# Altium PCB Roby-Eva.PcbDoc (part 2 of 2)
Units mil, origin at the board's own origin, x right, y up, seen from the top; angles counter-clockwise.
Board outline 3740.16 x 2519.69 mil, 2 copper layers (Top Layer, Bottom Layer); 61 components, 152 nets, 350 pads, 159 vias.
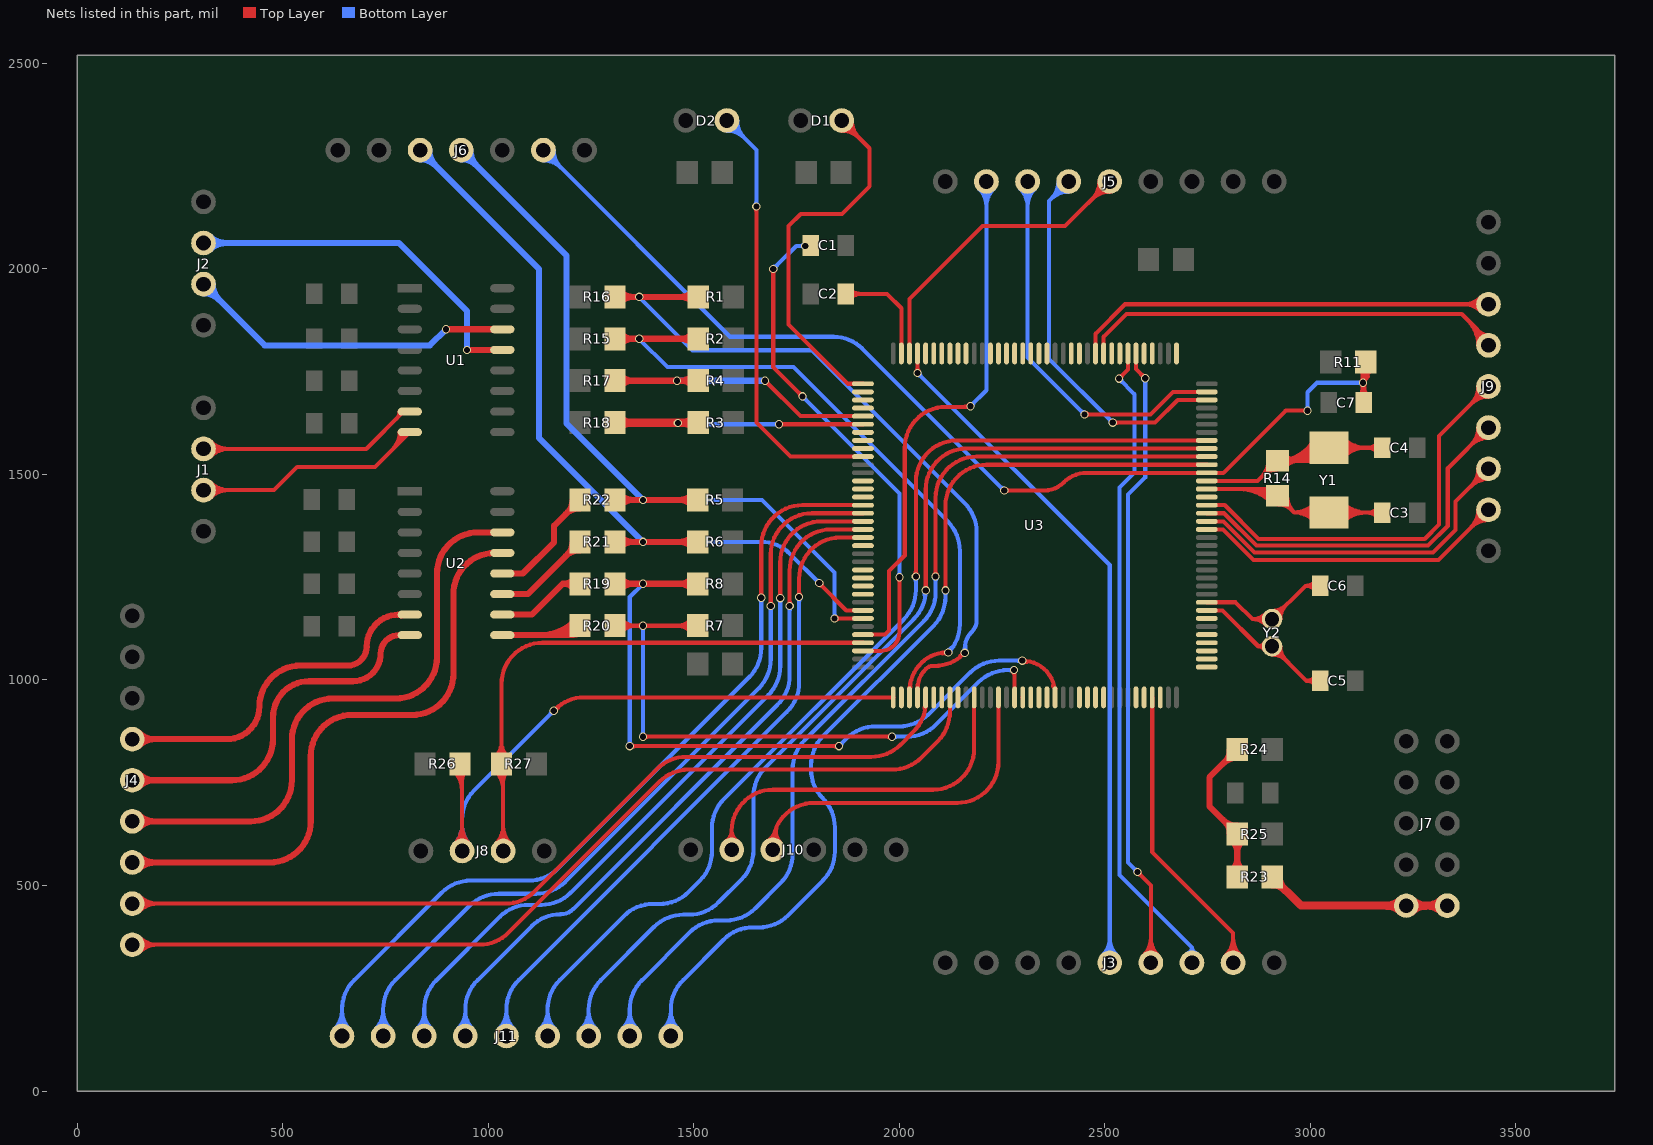
[diagram p2: the nets of this part, all layers, seen from the top]

## Via types
v1: diameter 20, hole 15, Top Layer to Bottom Layer, 106 vias
v2: diameter 19.68, hole 19.68, Top Layer to Bottom Layer, 48 vias
v3: diameter 200, hole 120, Top Layer to Bottom Layer, 4 vias
v4: diameter 25, hole 20, Top Layer to Bottom Layer, 1 vias

## Nets (pads, with @x,y where several pads share a name; then routed paths per layer and width w, separated by ;. In a path a pad name is that pad's centre, name@x,y a point inside that pad or via, vN(x,y) a via of type N, cw(c..) or ccw(c..) an arc to the next point about the centre after c; other vN are vias at no path point) (continued)
NetR19_1: R19.1 U2.10 | length 283.9
  Top Layer w15: U2.10@1034,1159 1106,1159 1180.96,1233.96 ; R19.1@1209.36,1221.46 ccw(c1180.96,1195.44) 1180.96,1233.96 ; R19.1@1209.36,1246.46 cw(c1180.96,1272.48) 1180.96,1233.96 ; R19.1@1223,1233.96 1180.96,1233.96
NetR20_1: R20.1 U2.9 | length 386.8
  Top Layer w15: U2.9@1034,1109 1200.06,1109 R20.1@1223,1131.94 ; 1127.79,1109 ccw(c1127.79,1225.15) R20.1@1209.92,1143.02 ; 1164,1109 ccw(c1164,1188.93) R20.1@1220.53,1132.41 ; R20.1@1200.22,1109 ccw(c1200.22,1152.72) R20.1@1231.13,1121.81
NetR21_1: R21.1 U2.11 | length 311.8
  Top Layer w15: U2.11@1034,1209 1096.02,1209 R21.1@1223,1335.98 ; 1188,1300.98 cw(c1223,1265.99) R21.1@1223,1315.48 ; 1192.83,1305.81 ccw(c1164.67,1333.98) R21.1@1204.5,1333.98
NetR22_1: R22.1 U2.12 | length 356.7
  Top Layer w15: U2.12@1034,1259 1084,1259 1160,1335 1160,1375 R22.1@1223,1438 ; 1188,1403 cw(c1223,1368.01) R22.1@1223,1417.5 ; 1192.83,1407.83 ccw(c1164.67,1436) R22.1@1204.5,1436
NetR23_1: R23.1 R24.1 R25.1 | length 646.9
  Top Layer w15: 2786.9,660 ccw(c2821.89,694.99) R25.1@2821.89,645.5 ; 2786.9,796 cw(c2821.89,761.01) R24.1@2821.89,810.5 ; 2791.73,655.17 cw(c2763.56,627) R25.1@2803.39,627 ; 2791.73,800.83 ccw(c2763.56,829) R24.1@2803.39,829 ; R23.1@2808.81,536.08 ccw(c2777.23,567.66) 2821.89,567.66 ccw(c2866.56,567.66) R23.1@2834.98,536.08 ; R25.1@2808.81,609.92 cw(c2777.23,578.34) 2821.89,578.34 cw(c2866.56,578.34) R25.1@2834.98,609.92 ; R23.1@2821.89,521 R25.1@2821.89,625 2754,692.89 2754,763.11 R24.1@2821.89,831
NRST: C7.2 J6.6 R11.2 U3.25 | length 3076.2
  Top Layer w10: v1(2254.95,1461) 2353.13,1461 ccw(c2353.13,1525.87) 2399,1480 cw(c2456.83,1422.17) 2456.83,1503.95 U3.25@2747.85,1503.95 2787.95,1503.95 2940,1656 v1@2994,1656 ; v1@2258.49,1457.46 cw(c2267.02,1448.93) 2267.02,1461 cw(c2267.02,1473.07) v1@2258.49,1464.54 ; 2978.51,1656 cw(c2978.51,1640.51) v1@2989.46,1651.46 ; C7.2@3118.89,1690.61 ccw(c3093.29,1716.21) 3129.5,1716.21 ccw(c3165.71,1716.21) C7.2@3140.11,1690.61 ; R11.2@3119.55,1756.15 cw(c3095.51,1732.12) v1@3129.5,1732.12 ; v1@3123.71,1720.43 cw(c3104.89,1709.15) 3126.09,1703.47 ; v1@3123.85,1725.78 ccw(c3106.57,1737.36) 3126.65,1742.74 ; v1@3124.46,1719.46 cw(c3112.31,1707.31) 3129.5,1707.31 ; v1@3124.46,1726.54 ccw(c3112.31,1738.69) 3129.5,1738.69 ; v1@3125.5,1718.67 cw(c3119.99,1709.13) 3130.63,1711.98 ; v1@3126.6,1727.8 ccw(c3120.71,1748.09) 3139.22,1737.91 ; C7.2@3129.5,1675 R11.2@3129.5,1768.11 ; 3129.5,1708.48 cw(c3196.91,1708.48) R11.2@3149.24,1756.15 ; v1@3129.5,1732.63 cw(c3172.77,1732.63) R11.2@3142.17,1763.22 ; 3130.77,1737.36 ccw(c3145.87,1733.32) v1@3132.33,1725.5 ; 3131.02,1710.54 cw(c3143.69,1713.94) v1@3132.33,1720.5
  Bottom Layer w10: J6.6@1134,2264 cw(c1134,2203.64) 1176.68,2246.32 cw(c1219.36,2289) J6.6@1159,2289 ; J6.6@1134,2274 cw(c1134,2237.79) 1159.61,2263.39 cw(c1185.21,2289) J6.6@1149,2289 ; J6.6@1134,2289 1588,1835 1791,1835 1791,1834.91 1839.63,1834.91 cw(c1839.63,1734.91) 1910.34,1805.62 v1(2254.95,1461) ; v1@2249.95,1461 ccw(c2237.88,1461) 2246.42,1469.54 ccw(c2254.95,1478.07) v1@2254.95,1466 ; v1@2989.46,1658.54 ccw(c2980.93,1667.07) 2993,1667.07 ccw(c3005.07,1667.07) v1@2996.54,1658.54 ; v1(2993,1655) 2993,1700 3016,1723 v1(3128,1723) ; v1@3124.46,1719.46 ccw(c3115.93,1710.93) 3115.93,1723 ccw(c3115.93,1735.07) v1@3124.46,1726.54
OSC32_IN: C5.1 U3.8 Y2.2 | length 510.5
  Top Layer w10: U3.8@2747.85,1169.31 2785.69,1169.31 2873,1082 ; Y2.2@2888.89,1072.51 ccw(c2873,1063.95) 2873,1082 ; Y2.2@2888.89,1091.49 cw(c2873,1100.05) 2873,1082 ; Y2.2@2906.5,1062 cw(c2906.5,1013.72) 2940.64,1047.86 cw(c2974.78,1082) Y2.2@2926.5,1082 ; C5.1@3012.2,988.14 ccw(c2990.5,969.2) 2990.5,998 ; C5.1@3012.2,1007.86 cw(c2990.5,1026.8) 2990.5,998 ; C5.1@3023.5,998 2990.5,998 ; 2873,1082 Y2.2@2906.5,1082 2990.5,998
OSC32_OUT: C6.1 U3.9 Y2.1 | length 532.4
  Top Layer w10: U3.9@2747.85,1188.99 2818.01,1188.99 2859,1148 ; Y2.1@2892.19,1134.02 ccw(c2859,1101.6) 2859,1148 ; Y2.1@2892.19,1161.98 cw(c2859,1194.4) 2859,1148 ; Y2.1@2906.5,1168 ccw(c2906.5,1216.28) 2940.64,1182.14 ccw(c2974.78,1148) Y2.1@2926.5,1148 ; C6.1@3012.85,1218.44 ccw(c2987.5,1193.3) 2987.5,1229 ; C6.1@3012.85,1239.56 cw(c2987.5,1264.7) 2987.5,1229 ; C6.1@3023.5,1229 2987.5,1229 ; 2859,1148 Y2.1@2906.5,1148 2987.5,1229
OSC_IN: C3.1 R14.2 U3.23 Y1.2 | length 1227.1
  Top Layer w10: U3.23@2747.85,1464.58 2903.42,1464.58 R14.2@2920,1448 2960.48,1407.52 ; 2827.27,1464.58 cw(c2827.27,1357.27) R14.2@2903.15,1433.15 ; 2851.41,1464.58 cw(c2851.41,1381.41) R14.2@2910.22,1440.22 ; 2875.55,1464.58 cw(c2875.55,1405.55) R14.2@2917.29,1447.29 ; R14.2@2922,1427 cw(c2922,1381.13) 2954.44,1413.56 ; R14.2@2933,1448 ccw(c2964.38,1448) R14.2@2942.19,1425.81 ; R14.2@2943,1448 ccw(c2998.53,1448) 2959.26,1408.74 ; Y1.2@3011.45,1384.66 ccw(c2960.48,1339.27) 2960.48,1407.52 ; Y1.2@3011.45,1430.38 cw(c2960.48,1475.77) 2960.48,1407.52 ; Y1.2@3018.92,1391.31 ccw(c2982.78,1359.13) 2982.78,1407.52 ccw(c2982.78,1455.91) Y1.2@3018.92,1423.73 ; Y1.2@3070.1,1390.29 cw(c3110.45,1349.94) 3110.45,1407 ; Y1.2@3070.1,1424.75 ccw(c3112.96,1467.61) 3112.96,1407 ; Y1.2@3077.17,1383.22 cw(c3134.59,1325.8) 3134.59,1407 ; Y1.2@3077.17,1431.82 ccw(c3137.1,1491.75) 3137.1,1407 ; C3.1@3163.89,1396.39 ccw(c3138.29,1370.79) 3138.29,1407 ccw(c3138.29,1443.21) C3.1@3163.89,1417.61 ; C3.1@3174.5,1407 3045.51,1407 Y1.2@3044.99,1407.52 2960.48,1407.52
OSC_OUT: C4.1 R14.1 U3.24 Y1.1 | length 1433.9
  Top Layer w10: U3.24@2747.85,1484.27 2871.27,1484.27 R14.1@2920,1533 ; 2880.74,1493.74 ccw(c2841.47,1533) R14.1@2897,1533 ; 2885.56,1498.56 cw(c2918,1466.13) R14.1@2918,1512 ; R14.1@2897.81,1510.81 ccw(c2875.62,1533) R14.1@2907,1533 ; R14.1@2929.78,1525.22 cw(c2948.56,1506.44) 2948.56,1533 cw(c2948.56,1559.56) R14.1@2929.78,1540.78 ; R14.1@2936.85,1518.15 cw(c2972.7,1482.3) 2972.7,1533 cw(c2972.7,1583.7) R14.1@2936.85,1547.85 ; R14.1@2937.65,1533 ccw(c2937.65,1624.57) Y1.1@3016.21,1577.52 ; 2955.3,1533 ccw(c2955.3,1614) Y1.1@3024.79,1572.38 ; 2972.94,1533 ccw(c2972.94,1603.44) Y1.1@3033.37,1567.25 ; 2990.59,1533 ccw(c2990.59,1592.87) Y1.1@3041.95,1562.11 ; Y1.1@3007.63,1582.66 cw(c2920,1635.14) R14.1@2920,1533 ; Y1.1@3008.23,1533 ccw(c3008.23,1582.3) Y1.1@3050.53,1556.97 ; Y1.1@3070.1,1547.77 cw(c3111.7,1506.17) 3111.7,1565 cw(c3111.7,1623.83) Y1.1@3070.1,1582.23 ; Y1.1@3077.17,1540.7 cw(c3135.84,1482.02) 3135.84,1565 cw(c3135.84,1647.98) Y1.1@3077.17,1589.3 ; C4.1@3163.89,1554.39 ccw(c3138.29,1528.79) 3138.29,1565 ccw(c3138.29,1601.21) C4.1@3163.89,1575.61 ; C4.1@3174.5,1565 Y1.1@3044.99,1565 3012.99,1533 R14.1@2920,1533
PA3: U3.37
PA9: J6.3 R6.1 R21.2 U3.101 | length 2261.3
  Top Layer w10: v1@1804.5,1235.5 1870.69,1169.31 U3.101@1911.23,1169.31 ; v1@1805,1231 cw(c1805,1221.34) 1811.83,1228.17 ; v1@1810,1236 ccw(c1824.49,1236) 1814.24,1225.76
  Top Layer w15: R21.2@1308,1335.98 1358,1335.98 ; R21.2@1321.08,1322.9 cw(c1352.66,1291.32) 1352.66,1335.98 cw(c1352.66,1380.64) R21.2@1321.08,1349.06 ; 1362.98,1335.98 v1(1376,1335.98) v1@1378.5,1335.98 ; v1@1373.52,1335.98 R6.1@1509,1335.98 ; R6.1@1495.92,1322.9 ccw(c1464.34,1291.32) 1464.34,1335.98 ccw(c1464.34,1380.64) R6.1@1495.92,1349.06
  Bottom Layer w10: v1(1376,1335.98) 1663.6,1335.98 cw(c1663.6,1235.98) 1734.31,1306.69 v1(1805,1236) ; v1@1379.54,1332.44 cw(c1388.07,1323.91) 1388.07,1335.98 cw(c1388.07,1348.05) v1@1379.54,1339.51 ; v1@1800,1236 ccw(c1787.93,1236) 1796.46,1244.54 ccw(c1805,1253.07) v1@1805,1241
  Bottom Layer w15: J6.3@834,2266.5 cw(c834,2212.18) 872.41,2250.59 cw(c910.82,2289) J6.3@856.5,2289 ; J6.3@834,2289 1123,2000 1123,1588.98 v1(1376,1335.98)
PA10: J6.4 R5.1 R22.2 U3.102 | length 2237.9
  Top Layer w10: v1(1842.38,1149.62) U3.102@1911.23,1149.62 ; v1@1845.91,1146.09 cw(c1854.45,1137.55) 1854.45,1149.62 cw(c1854.45,1161.69) v1@1845.91,1153.16
  Top Layer w15: R22.2@1308,1438 R5.1@1509,1438 ; R22.2@1321.08,1424.92 cw(c1352.66,1393.34) 1352.66,1438 cw(c1352.66,1482.66) R22.2@1321.08,1451.08 ; R5.1@1495.92,1424.92 ccw(c1464.34,1393.34) 1464.34,1438 ccw(c1464.34,1482.66) R5.1@1495.92,1451.08
  Bottom Layer w10: v1(1376,1438) 1666,1438 1842.38,1261.62 v1(1842.38,1149.62) ; v1@1379.54,1434.46 cw(c1388.07,1425.93) 1388.07,1438 cw(c1388.07,1450.07) v1@1379.54,1441.54 ; v1@1838.84,1153.16 ccw(c1830.31,1161.69) 1842.38,1161.69 ccw(c1854.45,1161.69) v1@1845.91,1153.16
  Bottom Layer w15: J6.4@934,2266.5 cw(c934,2212.18) 972.41,2250.59 cw(c1010.82,2289) J6.4@956.5,2289 ; J6.4@934,2289 1190,2033 1190,1624 v1(1376,1438)
PA15: U3.110
PB3: U3.133
PB4: U3.134
PB5: U3.135
PB8: U3.139
PB9: U3.140
PB12: D1.2 U3.73 | length 1056.9
  Top Layer w10: D1.2@1859.5,2336 cw(c1859.5,2275.64) 1902.18,2318.32 cw(c1944.86,2361) D1.2@1884.5,2361 ; D1.2@1859.5,2346 cw(c1859.5,2309.79) 1885.11,2335.39 cw(c1910.71,2361) D1.2@1874.5,2361 ; D1.2@1859.5,2361 1927,2293.5 1927,2201 1860,2134 1760,2134 1730,2104 1730,1865 1874.51,1720.49 U3.73@1911.23,1720.49
PB13: U3.74
PB14: U3.75
PB15: U3.76
PC6: U3.96
PC7: U3.97
PC8: U3.98
PC9: U3.99
PC13: U3.7
PD0: U3.114
PD1: U3.115
PD3: U3.117
PD10: U3.79
PD11: U3.80
PD12: U3.81
PD13: D2.2 U3.82 | length 1247.7
  Top Layer w10: v1@1648.46,2148.46 cw(c1639.93,2139.93) 1652,2139.93 cw(c1664.07,2139.93) v1@1655.54,2148.46 ; v1(1652,2152) 1652,1626 1734.68,1543.32 U3.82@1911.23,1543.32
  Bottom Layer w10: D2.2@1580.5,2336 cw(c1580.5,2275.64) 1623.18,2318.32 cw(c1665.86,2361) D2.2@1605.5,2361 ; D2.2@1580.5,2346 cw(c1580.5,2309.79) 1606.11,2335.39 cw(c1631.71,2361) D2.2@1595.5,2361 ; D2.2@1580.5,2361 1652,2289.5 v1(1652,2152) ; v1@1648.46,2155.54 ccw(c1639.93,2164.07) 1652,2164.07 ccw(c1664.07,2164.07) v1@1655.54,2155.54
PD14: U3.85
PD15: U3.86
PE1: U3.142
PE2: U3.1
PE3: U3.2
PE4: U3.3
PE5: U3.4
PE6: U3.5
PE7: U3.58
PE8: U3.59
PE9: U3.60
PE10: U3.63
PE11: U3.64
PE12: U3.65
PE13: U3.66
PE14: U3.67
PE15: U3.68
PF10: U3.22
PF11: U3.49
PF12: U3.50
PF13: U3.53
PF14: U3.54
PF15: U3.55
PG0: U3.56
PG1: U3.57
PG2: U3.87
PG3: J11.1 U3.88 | length 2221.8
  Top Layer w10: v1@1660.46,1203.54 ccw(c1651.93,1212.07) 1664,1212.07 ccw(c1676.07,1212.07) v1@1667.54,1203.54 ; v1(1664,1200) 1664,1325.21 cw(c1764,1325.21) 1764,1425.21 U3.88@1911.23,1425.21
  Bottom Layer w10: J11.1@626.32,151.54 ccw(c583.64,194.21) 644,194.21 ccw(c704.36,194.21) J11.1@661.68,151.54 ; J11.1@633.39,144.46 ccw(c607.79,170.07) 644,170.07 ccw(c680.21,170.07) J11.1@654.61,144.46 ; J11.1@644,133.86 644,198.67 cw(c744,198.67) 673.29,269.38 886.62,482.71 cw(c957.33,412) 957.33,512 1098.58,512 ccw(c1098.58,612) 1169.29,541.29 1634.71,1006.71 ccw(c1564,1077.42) 1664,1077.42 v1(1664,1200) ; v1@1660.46,1196.46 cw(c1651.93,1187.93) 1664,1187.93 cw(c1676.07,1187.93) v1@1667.54,1196.46
PG4: J11.2 U3.89 | length 2118
  Top Layer w10: v1@1683.46,1183.54 ccw(c1674.93,1192.07) 1687,1192.07 ccw(c1699.07,1192.07) v1@1690.54,1183.54 ; v1(1687,1180) 1687,1305.53 cw(c1787,1305.53) 1787,1405.53 U3.89@1911.23,1405.53
  Bottom Layer w10: J11.2@726.32,151.54 ccw(c683.64,194.21) 744,194.21 ccw(c804.36,194.21) J11.2@761.68,151.54 ; J11.2@733.39,144.46 ccw(c707.79,170.07) 744,170.07 ccw(c780.21,170.07) J11.2@754.61,144.46 ; J11.2@744,133.86 744,198.67 cw(c844,198.67) 773.29,269.38 954.62,450.71 cw(c1025.33,380) 1025.33,480 1116.58,480 ccw(c1116.58,580) 1187.29,509.29 1657.71,979.71 ccw(c1587,1050.42) 1687,1050.42 v1(1687,1180) ; v1@1683.46,1176.46 cw(c1674.93,1167.93) 1687,1167.93 cw(c1699.07,1167.93) v1@1690.54,1176.46
PG5: J11.3 U3.90 | length 2008.2
  Top Layer w10: v1@1706.46,1202.54 ccw(c1697.93,1211.07) 1710,1211.07 ccw(c1722.07,1211.07) v1@1713.54,1202.54 ; v1(1710,1199) 1710,1285.84 cw(c1810,1285.84) 1810,1385.84 U3.90@1911.23,1385.84
  Bottom Layer w10: J11.3@826.32,151.54 ccw(c783.64,194.21) 844,194.21 ccw(c904.36,194.21) J11.3@861.68,151.54 ; J11.3@833.39,144.46 ccw(c807.79,170.07) 844,170.07 ccw(c880.21,170.07) J11.3@854.61,144.46 ; J11.3@844,133.86 844,198.67 cw(c944,198.67) 873.29,269.38 1027.62,423.71 cw(c1098.33,353) 1098.33,453 1129.58,453 ccw(c1129.58,553) 1200.29,482.29 1680.71,962.71 ccw(c1610,1033.42) 1710,1033.42 v1(1710,1199) ; v1@1706.46,1195.46 cw(c1697.93,1186.93) 1710,1186.93 cw(c1722.07,1186.93) v1@1713.54,1195.46
PG6: J11.4 U3.91 | length 1904.4
  Top Layer w10: v1@1729.46,1183.54 ccw(c1720.93,1192.07) 1733,1192.07 ccw(c1745.07,1192.07) v1@1736.54,1183.54 ; v1(1733,1180) 1733,1266.16 cw(c1833,1266.16) 1833,1366.16 U3.91@1911.23,1366.16
  Bottom Layer w10: J11.4@926.32,151.54 ccw(c883.64,194.21) 944,194.21 ccw(c1004.36,194.21) J11.4@961.68,151.54 ; J11.4@933.39,144.46 ccw(c907.79,170.07) 944,170.07 ccw(c980.21,170.07) J11.4@954.61,144.46 ; J11.4@944,133.86 944,198.67 cw(c1044,198.67) 973.29,269.38 1104.62,400.71 cw(c1175.33,330) 1175.33,430 ccw(c1175.33,475.06) 1207.2,443.2 1703.71,939.71 ccw(c1633,1010.42) 1733,1010.42 v1(1733,1180) ; v1@1729.46,1176.46 cw(c1720.93,1167.93) 1733,1167.93 cw(c1745.07,1167.93) v1@1736.54,1176.46
PG7: J11.5 U3.92 | length 1800.9
  Top Layer w10: v1@1752.46,1205.54 ccw(c1743.93,1214.07) 1756,1214.07 ccw(c1768.07,1214.07) v1@1759.54,1205.54 ; v1(1756,1202) 1756,1246.47 cw(c1856,1246.47) 1856,1346.47 U3.92@1911.23,1346.47
  Bottom Layer w10: J11.5@1026.32,151.54 ccw(c983.64,194.21) 1044,194.21 ccw(c1104.36,194.21) J11.5@1061.68,151.54 ; J11.5@1033.39,144.46 ccw(c1007.79,170.07) 1044,170.07 ccw(c1080.21,170.07) J11.5@1054.61,144.46 ; J11.5@1044,133.86 1044,198.67 cw(c1144,198.67) 1073.29,269.38 1726.71,922.8 ccw(c1656,993.51) 1756,993.51 v1(1756,1202) ; v1@1752.46,1198.46 cw(c1743.93,1189.93) 1756,1189.93 cw(c1768.07,1189.93) v1@1759.54,1198.46
PG8: U3.93
PG10: U3.125 | length 0
PG11: U3.126
PG12: U3.127
PG13: U3.128
PG15: U3.132
PHA_N_L: J3.3 U3.43 | length 1669.3
  Top Layer w10: v1(2534,1733) 2555.92,1754.92 U3.43@2555.92,1794.31 ; v1@2534,1738 ccw(c2534,1750.07) 2542.54,1741.54 ccw(c2551.07,1733) v1@2539,1733
  Bottom Layer w10: v1@2534,1728 cw(c2534,1715.93) 2542.54,1724.46 cw(c2551.07,1733) v1@2539,1733 ; v1(2534,1733) 2572,1695 2572,1505 2535,1468 2535,526 2711.74,349.26 ; J3.3@2702.31,335.24 ccw(c2696.61,349.26) 2711.74,349.26 ; J3.3@2711.74,312.09 2711.74,349.26 ; J3.3@2721.17,335.24 cw(c2726.88,349.26) 2711.74,349.26
PHA_N_R: J5.3 U3.35 | length 1133.7
  Top Layer w10: v1(2450.61,1646) 2611,1646 2665.8,1700.8 U3.35@2747.85,1700.8 ; v1@2454.14,1642.46 cw(c2462.68,1633.93) 2462.68,1646 cw(c2462.68,1658.07) v1@2454.14,1649.54
  Bottom Layer w10: J5.3@2294.06,2194.92 cw(c2251.38,2152.24) 2311.74,2152.24 cw(c2372.1,2152.24) J5.3@2329.42,2194.92 ; J5.3@2301.13,2201.99 cw(c2275.53,2176.39) 2311.74,2176.39 cw(c2347.95,2176.39) J5.3@2322.35,2201.99 ; J5.3@2311.74,2212.6 2311.74,1784.87 v1(2450.61,1646) ; v1@2445.61,1646 ccw(c2433.54,1646) 2442.07,1654.54 ccw(c2450.61,1663.07) v1@2450.61,1651
PHA_P_L: J3.4 U3.42 | length 1759.5
  Top Layer w10: U3.42@2575.6,1794.31 2575.6,1756.4 v1(2598,1734) ; v1@2579,528 cw(c2579,515.93) 2587.54,524.46 cw(c2596.07,533) v1@2584,533 ; v1(2579,533) 2611.74,500.26 J3.4@2611.74,312.09 ; v1@2593,1734 ccw(c2580.93,1734) 2589.46,1742.54 ccw(c2598,1751.07) v1@2598,1739 ; J3.4@2594.06,329.76 ccw(c2551.38,372.44) 2611.74,372.44 ccw(c2672.1,372.44) J3.4@2629.42,329.76 ; J3.4@2601.13,322.69 ccw(c2575.53,348.3) 2611.74,348.3 ccw(c2647.95,348.3) J3.4@2622.35,322.69
  Bottom Layer w10: v1@2574,533 ccw(c2561.93,533) 2570.46,541.54 ccw(c2579,550.07) v1@2579,538 ; v1(2579,533) 2556,556 2556,1451 2598,1493 v1(2598,1734) ; v1@2594.46,1730.46 cw(c2585.93,1721.93) 2598,1721.93 cw(c2610.07,1721.93) v1@2601.54,1730.46
PHA_P_R: J5.4 U3.34 | length 1111.9
  Top Layer w10: v1(2519,1626) 2622,1626 2677.12,1681.12 U3.34@2747.85,1681.12 ; v1@2522.54,1622.46 cw(c2531.07,1613.93) 2531.07,1626 cw(c2531.07,1638.07) v1@2522.54,1629.54
  Bottom Layer w10: J5.4@2386.74,2212.6 cw(c2326.38,2212.6) 2369.06,2169.92 cw(c2411.74,2127.24) J5.4@2411.74,2187.6 ; J5.4@2396.74,2212.6 cw(c2360.53,2212.6) 2386.13,2186.99 cw(c2411.74,2161.39) J5.4@2411.74,2197.6 ; J5.4@2411.74,2212.6 2364,2164.86 2364,1781 v1(2519,1626) ; v1@2514,1626 ccw(c2501.93,1626) 2510.46,1634.54 ccw(c2519,1643.07) v1@2519,1631
PHO_SW_OUT1: J9.8 U3.18 | length 918.2
  Top Layer w10: U3.18@2747.85,1366.16 2786.84,1366.16 2861,1292 3311.07,1292 J9.8@3433.07,1414 ; J9.8@3408.07,1414 cw(c3347.72,1414) 3390.39,1371.32 cw(c3433.07,1328.64) J9.8@3433.07,1389 ; J9.8@3418.07,1414 cw(c3381.86,1414) 3407.46,1388.39 cw(c3433.07,1362.79) J9.8@3433.07,1399
PHO_SW_OUT2: J9.7 U3.19 | length 993.2
  Top Layer w10: U3.19@2747.85,1385.84 2788.37,1385.84 2864.21,1310 3298,1310 3353,1365 3353,1433.93 J9.7@3433.07,1514 ; J9.7@3408.07,1514 cw(c3347.72,1514) 3390.39,1471.32 cw(c3433.07,1428.64) J9.7@3433.07,1489 ; J9.7@3418.07,1514 cw(c3381.86,1514) 3407.46,1488.39 cw(c3433.07,1462.79) J9.7@3433.07,1499
PHO_SW_OUT3: J9.6 U3.20 | length 1070.3
  Top Layer w10: U3.20@2747.85,1405.53 2789.9,1405.53 2868.43,1327 3286,1327 3334,1375 3334,1514.93 J9.6@3433.07,1614 ; J9.6@3408.07,1614 cw(c3347.72,1614) 3390.39,1571.32 cw(c3433.07,1528.64) J9.6@3433.07,1589 ; J9.6@3418.07,1614 cw(c3381.86,1614) 3407.46,1588.39 cw(c3433.07,1562.79) J9.6@3433.07,1599
PHO_SW_OUT4: J9.5 U3.21 | length 1151.1
  Top Layer w10: U3.21@2747.85,1425.21 2791.43,1425.21 2873.64,1343 3278,1343 3313,1378 3313,1593.93 J9.5@3433.07,1714 ; J9.5@3408.07,1714 cw(c3347.72,1714) 3390.39,1671.32 cw(c3433.07,1628.64) J9.5@3433.07,1689 ; J9.5@3418.07,1714 cw(c3381.86,1714) 3407.46,1688.39 cw(c3433.07,1662.79) J9.5@3433.07,1699
PHO_SW_OUT5: J9.4 U3.46 | length 1216.2
  Top Layer w10: U3.46@2496.86,1794.31 2496.86,1834.86 2552,1890 3368,1890 J9.4@3444,1814 ; 3382.67,1875.33 cw(c3321.33,1814) J9.4@3408.07,1814 ; 3399.74,1858.26 cw(c3355.47,1814) J9.4@3418.07,1814 ; 3409.05,1848.95 ccw(c3433.07,1872.97) J9.4@3433.07,1839 ; 3416.81,1841.19 cw(c3389.61,1814) J9.4@3428.07,1814
PHO_SW_OUT6: J9.3 U3.47 | length 1196.1
  Top Layer w10: U3.47@2477.18,1794.31 2477.18,1842.18 2549,1914 J9.3@3444,1914 ; J9.3@3415.39,1896.32 ccw(c3372.72,1853.64) 3372.72,1914 ccw(c3372.72,1974.36) J9.3@3415.39,1931.68 ; J9.3@3422.46,1903.39 ccw(c3396.86,1877.79) 3396.86,1914 ccw(c3396.86,1950.21) J9.3@3422.46,1924.61
PULSE_L: J3.2 U3.141 | length 878.8
  Top Layer w10: U3.141@2614.97,957.69 2614.97,581.03 2811.74,384.26 J3.2@2811.74,312.09 ; J3.2@2794.06,329.76 ccw(c2751.38,372.44) 2811.74,372.44 ccw(c2872.1,372.44) J3.2@2829.42,329.76 ; J3.2@2801.13,322.69 ccw(c2775.53,348.3) 2811.74,348.3 ccw(c2847.95,348.3) J3.2@2822.35,322.69
PULSE_R: J5.2 U3.104 | length 1489.4
  Top Layer w10: U3.104@1911.23,1110.25 1965.25,1110.25 1975,1120 1975,1265 2013,1303 2013,1564.5 cw(c2113,1564.5) 2113,1664.5 v1@2170.5,1664.5 ; 2157.31,1664.5 ccw(c2157.31,1681.69) v1@2169.46,1669.54
  Bottom Layer w10: v1(2173,1666) 2211.74,1704.74 J5.2@2211.74,2212.6 ; v1@2173,1671 ccw(c2173,1683.07) 2181.54,1674.54 ccw(c2190.07,1666) v1@2178,1666 ; J5.2@2194.06,2194.92 cw(c2151.38,2152.24) 2211.74,2152.24 cw(c2272.1,2152.24) J5.2@2229.42,2194.92 ; J5.2@2201.13,2201.99 cw(c2175.53,2176.39) 2211.74,2176.39 cw(c2247.95,2176.39) J5.2@2222.35,2201.99
PWM_L: J3.5 U3.69 | length 1865.5
  Top Layer w10: v1@2040.57,1750.43 ccw(c2032.04,1758.96) 2044.11,1758.96 ccw(c2056.18,1758.96) v1@2047.64,1750.43 ; v1(2044.11,1746.89) U3.69@2044.11,1794.31
  Bottom Layer w10: v1@2044.11,1741.89 cw(c2044.11,1729.82) 2052.64,1738.36 cw(c2061.18,1746.89) v1@2049.11,1746.89 ; v1(2044.11,1746.89) 2511.74,1279.26 J3.5@2511.74,312.09 ; J3.5@2494.06,329.76 ccw(c2451.38,372.44) 2511.74,372.44 ccw(c2572.1,372.44) J3.5@2529.42,329.76 ; J3.5@2501.13,322.69 ccw(c2475.53,348.3) 2511.74,348.3 ccw(c2547.95,348.3) J3.5@2522.35,322.69
PWM_R: J5.5 U3.70 | length 889.7
  Top Layer w10: U3.70@2024.42,1794.31 2024.42,1926.42 2202,2104 2403.14,2104 J5.5@2511.74,2212.6 ; J5.5@2486.74,2212.6 cw(c2426.38,2212.6) 2469.06,2169.92 cw(c2511.74,2127.24) J5.5@2511.74,2187.6 ; J5.5@2496.74,2212.6 cw(c2460.53,2212.6) 2486.13,2186.99 cw(c2511.74,2161.39) J5.5@2511.74,2197.6
R1IN_U1: J4.7 U2.13 | length 1566.8
  Top Layer w15: J4.7@133.86,556 468,556 ccw(c468,656) 568,656 568,815 cw(c668,815) 668,915 815,915 ccw(c815,1015) 915,1015 915,1209 cw(c1015,1209) 1015,1309 U2.13@1034,1309 ; J4.7@149.77,540.09 cw(c188.18,501.68) 188.18,556 cw(c188.18,610.32) J4.7@149.77,571.91
R1IN_U3: J1.2 U1.8 | length 794.6
  Top Layer w10: J1.2@307.09,1462 479,1462 535,1518 724,1518 U1.8@809,1603 ; J1.2@317.69,1451.39 cw(c343.3,1425.79) 343.3,1462 cw(c343.3,1498.21) J1.2@317.69,1472.61 ; J1.2@324.76,1444.32 cw(c367.44,1401.64) 367.44,1462 cw(c367.44,1522.36) J1.2@324.76,1479.68 ; 767.13,1561.13 ccw(c725.26,1603) U1.8@784.47,1603 ; 784.2,1578.2 ccw(c759.4,1603) U1.8@794.47,1603 ; U1.8@801.27,1595.27 ccw(c793.54,1603) U1.8@804.47,1603
R1IN_U4: J2.3 U1.13 | length 975.6
  Top Layer w15: v1(948,1803) U1.13@1034,1803
  Bottom Layer w15: J2.3@307.09,2063 783,2063 948,1898 v1(948,1803) ; J2.3@323,2047.09 cw(c361.41,2008.68) 361.41,2063 cw(c361.41,2117.32) J2.3@323,2078.91
R1IN_U6: J4.5 U2.8 | length 984.7
  Top Layer w15: J4.5@133.86,756 376,756 ccw(c376,856) 476,856 476,909 cw(c564,909) 564,997 671,997 ccw(c671,1064) 738,1064 cw(c783,1064) 783,1109 U2.8@809,1109 ; J4.5@149.77,740.09 cw(c188.18,701.68) 188.18,756 cw(c188.18,810.32) J4.5@149.77,771.91
SWDCLK: J8.2 R26.2 U3.109 | length 1925.6
  Top Layer w10: R26.2@916.15,779.15 cw(c868.23,731.23) 936,731.23 ; J8.2@918.32,601.68 ccw(c875.64,644.36) 936,644.36 ccw(c996.36,644.36) J8.2@953.68,601.68 ; R26.2@923.22,786.22 cw(c892.37,755.37) 936,755.37 cw(c969.63,755.37) R26.2@945.85,779.15 ; J8.2@925.39,594.61 ccw(c899.79,620.21) 936,620.21 ccw(c972.21,620.21) J8.2@946.61,594.61 ; J8.2@936,584 R26.2@936,797 ; v1(1159,925) 1162.4,928.4 cw(c1233.11,857.69) 1233.11,957.69 U3.109@1985.05,957.69 ; v1@1163.9,924.03 cw(c1178.88,921.05) 1170.39,933.75
  Bottom Layer w10: J8.2@918.32,601.68 ccw(c875.64,644.36) 936,644.36 ccw(c996.36,644.36) J8.2@953.68,601.68 ; J8.2@925.39,594.61 ccw(c899.79,620.21) 936,620.21 ccw(c972.21,620.21) J8.2@946.61,594.61 ; J8.2@936,584 936,660.58 cw(c1036,660.58) 965.29,731.29 v1(1159,925) ; v1@1154,925 cw(c1141.93,925) 1150.46,916.46 cw(c1159,907.93) v1@1159,920
SWDIO: J8.3 R27.2 U3.105 | length 1742.1
  Top Layer w10: R27.2@1017.15,779.15 cw(c971.64,733.64) 1036,733.64 ; R27.2@1017.15,812.85 ccw(c981.3,848.7) 1032,848.7 ccw(c1082.7,848.7) R27.2@1046.85,812.85 ; J8.3@1018.32,601.68 ccw(c975.64,644.36) 1036,644.36 ccw(c1096.36,644.36) J8.3@1053.68,601.68 ; R27.2@1024.22,786.22 cw(c995.79,757.79) 1036,757.79 ; R27.2@1024.22,805.78 ccw(c1005.44,824.56) 1032,824.56 ccw(c1058.56,824.56) R27.2@1039.78,805.78 ; J8.3@1025.39,594.61 ccw(c999.79,620.21) 1036,620.21 ccw(c1072.21,620.21) J8.3@1046.61,594.61 ; R27.2@1032,796 1032,990.57 cw(c1132,990.57) 1132,1090.57 U3.105@1911.23,1090.57 ; J8.3@1036,584 R27.2@1036,811 ; 1036,752.96 cw(c1073.04,752.96) R27.2@1046.85,779.15
T1OUT_U1: J4.6 U2.14 | length 1516.8
  Top Layer w15: J4.6@133.86,656 422,656 ccw(c422,756) 522,756 522,855 cw(c622,855) 622,955 775,955 ccw(c775,1055) 875,1055 875,1259 cw(c975,1259) 975,1359 U2.14@1034,1359 ; J4.6@149.77,640.09 cw(c188.18,601.68) 188.18,656 cw(c188.18,710.32) J4.6@149.77,671.91
T1OUT_U3: J1.3 U1.7 | length 709.4
  Top Layer w10: J1.3@307.09,1562 703,1562 794,1653 U1.7@809,1653 ; J1.3@317.69,1551.39 cw(c343.3,1525.79) 343.3,1562 cw(c343.3,1598.21) J1.3@317.69,1572.61 ; J1.3@324.76,1544.32 cw(c367.44,1501.64) 367.44,1562 cw(c367.44,1622.36) J1.3@324.76,1579.68 ; 777.74,1636.74 ccw(c761.47,1653) U1.7@784.47,1653
T1OUT_U4: J2.2 U1.14 | length 890.1
  Top Layer w15: v1(897,1853) U1.14@1034,1853
  Bottom Layer w15: J2.2@307.09,1940.5 cw(c307.09,1886.18) 345.5,1924.59 cw(c383.91,1963) J2.2@329.59,1963 ; J2.2@307.09,1963 456.09,1814 858,1814 v1(897,1853)
T1OUT_U6: J4.4 U2.7 | length 942.9
  Top Layer w15: J4.4@133.86,856 364,856 ccw(c364,935) 443,935 cw(c543,935) 543,1035 658,1035 ccw(c658,1081) 704,1081 cw(c782,1081) 782,1159 U2.7@809,1159 ; J4.4@149.77,840.09 cw(c188.18,801.68) 188.18,856 cw(c188.18,910.32) J4.4@149.77,871.91 ; 778.95,1158.18 cw(c782.08,1146.48) U2.7@788.14,1156.97
TOUCH_SENSOR1: J11.9 U3.26 | length 2520.1
  Top Layer w10: v1@2108.46,1221.54 ccw(c2099.93,1230.07) 2112,1230.07 ccw(c2124.07,1230.07) v1@2115.54,1221.54 ; v1(2112,1218) 2112,1423.64 cw(c2212,1423.64) 2212,1523.64 U3.26@2747.85,1523.64
  Bottom Layer w10: J11.9@1426.32,151.54 ccw(c1383.64,194.21) 1444,194.21 ccw(c1504.36,194.21) J11.9@1461.68,151.54 ; J11.9@1433.39,144.46 ccw(c1407.79,170.07) 1444,170.07 ccw(c1480.21,170.07) J11.9@1454.61,144.46 ; J11.9@1444,133.86 1444,198.67 cw(c1544,198.67) 1473.29,269.38 1572.62,368.71 cw(c1643.33,298) 1643.33,398 1658.58,398 ccw(c1658.58,498) 1729.29,427.29 1813.71,511.71 ccw(c1743,582.42) 1843,582.42 1843,641.58 ccw(c1743,641.58) 1813.71,712.29 cw(c1882.77,781.35) 1785.11,781.35 1785.11,792.69 cw(c1885.11,792.69) 1814.4,863.4 2082.71,1131.71 ccw(c2012,1202.42) 2112,1202.42 v1(2112,1218) ; v1@2108.46,1214.46 cw(c2099.93,1205.93) 2112,1205.93 cw(c2124.07,1205.93) v1@2115.54,1214.46
TOUCH_SENSOR2: J11.8 U3.27 | length 2557.6
  Top Layer w10: v1@2084.46,1255.54 ccw(c2075.93,1264.07) 2088,1264.07 ccw(c2100.07,1264.07) v1@2091.54,1255.54 ; v1(2088,1252) 2088,1443.32 cw(c2188,1443.32) 2188,1543.32 U3.27@2747.85,1543.32
  Bottom Layer w10: J11.8@1326.32,151.54 ccw(c1283.64,194.21) 1344,194.21 ccw(c1404.36,194.21) J11.8@1361.68,151.54 ; J11.8@1333.39,144.46 ccw(c1307.79,170.07) 1344,170.07 ccw(c1380.21,170.07) J11.8@1354.61,144.46 ; J11.8@1344,133.86 1344,198.67 cw(c1444,198.67) 1373.29,269.38 1489.62,385.71 cw(c1560.33,315) 1560.33,415 1578.58,415 ccw(c1578.58,515) 1649.29,444.29 1710.71,505.71 ccw(c1640,576.42) 1740,576.42 1740,782.58 cw(c1840,782.58) 1769.29,853.29 2058.71,1142.71 ccw(c1988,1213.42) 2088,1213.42 v1(2088,1252) ; v1@2084.46,1248.46 cw(c2075.93,1239.93) 2088,1239.93 cw(c2100.07,1239.93) v1@2091.54,1248.46
TOUCH_SENSOR3: J11.7 U3.28 | length 2630.4
  Top Layer w10: v1@2060.46,1221.54 ccw(c2051.93,1230.07) 2064,1230.07 ccw(c2076.07,1230.07) v1@2067.54,1221.54 ; v1(2064,1218) 2064,1463.01 cw(c2164,1463.01) 2164,1563.01 U3.28@2747.85,1563.01
  Bottom Layer w10: J11.7@1226.32,151.54 ccw(c1183.64,194.21) 1244,194.21 ccw(c1304.36,194.21) J11.7@1261.68,151.54 ; J11.7@1233.39,144.46 ccw(c1207.79,170.07) 1244,170.07 ccw(c1280.21,170.07) J11.7@1254.61,144.46 ; J11.7@1244,133.86 1244,198.67 cw(c1344,198.67) 1273.29,269.38 1403.62,399.71 cw(c1474.33,329) 1474.33,429 1488.58,429 ccw(c1488.58,529) 1559.29,458.29 1615.71,514.71 ccw(c1545,585.42) 1645,585.42 1645,716.58 cw(c1745,716.58) 1674.29,787.29 2035.01,1148.01 ccw(c1965.02,1218) v1(2064,1218) ; v1@2059.82,1215.25 cw(c2049.74,1208.62) 2061.56,1206.18 cw(c2073.38,1203.74) v1@2066.75,1213.82
TOUCH_SENSOR4: J11.6 U3.29 | length 2706.7
  Top Layer w10: v1@2036.46,1255.54 ccw(c2027.93,1264.07) 2040,1264.07 ccw(c2052.07,1264.07) v1@2043.54,1255.54 ; v1(2040,1252) 2040,1482.69 cw(c2140,1482.69) 2140,1582.69 U3.29@2747.85,1582.69
  Bottom Layer w10: J11.6@1126.32,151.54 ccw(c1083.64,194.21) 1144,194.21 ccw(c1204.36,194.21) J11.6@1161.68,151.54 ; J11.6@1133.39,144.46 ccw(c1107.79,170.07) 1144,170.07 ccw(c1180.21,170.07) J11.6@1154.61,144.46 ; J11.6@1144,133.86 1144,198.67 cw(c1244,198.67) 1173.29,269.38 1329.62,425.71 cw(c1400.33,355) 1400.33,455 1416.58,455 ccw(c1416.58,555) 1487.29,484.29 1514.71,511.71 ccw(c1444,582.42) 1544,582.42 1544,639.58 cw(c1644,639.58) 1573.29,710.29 2010.71,1147.71 ccw(c1940,1218.42) 2040,1218.42 v1(2040,1252) ; v1@2036.46,1248.46 cw(c2027.93,1239.93) 2040,1239.93 cw(c2052.07,1239.93) v1@2043.54,1248.46
US016_OUT1: U3.40
US016_OUT2: U3.41
US016_OUT3: U3.44
US016_OUT4: U3.45
USART2_RX: J10.3 U3.122 | length 936.8
  Top Layer w10: J10.3@1678.87,608.27 ccw(c1652.95,650.27) 1700.97,638.9 ; J10.3@1692,587 1692,601 cw(c1792,601) 1792,701 2140.96,701 ccw(c2140.96,801) 2240.96,801 U3.122@2240.96,957.69 ; 1696.78,621.2 ccw(c1722.6,615.09) J10.3@1703.05,597.14 ; 1701.12,639.55 ccw(c1739.4,630.5) J10.3@1710.42,603.9
USART2_TX: J10.2 U3.119 | length 934.1
  Top Layer w10: J10.2@1578.4,607.98 ccw(c1562.18,633) 1592,633 ; J10.2@1592,587 1592,633 ; J10.2@1605.6,607.98 cw(c1621.82,633) 1592,633 ; U3.119@2181.9,957.69 2181.9,833 cw(c2081.9,833) 2081.9,733 1692,733 ccw(c1692,633) 1592,633
USART3_RX: R3.1 R18.2 U3.78 | length 829.9
  Top Layer w10: v1(1707,1622.06) U3.78@1911.23,1622.06 ; v1@1710.54,1618.53 cw(c1719.07,1609.99) 1719.07,1622.06 cw(c1719.07,1634.13) v1@1710.54,1625.6
  Top Layer w20: R18.2@1308,1625.94 R3.1@1511,1625.94 ; R18.2@1319.31,1614.62 cw(c1346.63,1587.31) 1346.63,1625.94 cw(c1346.63,1664.56) R18.2@1319.31,1637.25 ; R3.1@1499.69,1614.62 ccw(c1472.37,1587.31) 1472.37,1625.94 ccw(c1472.37,1664.56) R3.1@1499.69,1637.25
  Bottom Layer w10: v1@1461,1622.06 v1(1707,1622.06) ; v1@1464.54,1628.54 ccw(c1480.16,1644.16) 1480.16,1622.06 ; v1@1703.46,1618.53 ccw(c1694.93,1609.99) 1694.93,1622.06 ccw(c1694.93,1634.13) v1@1703.46,1625.6
  other v1: 1461,1625
USART3_TX: R4.1 R17.2 U3.77 | length 869.9
  Top Layer w10: v1@1673,1722.96 cw(c1673,1710.89) 1681.54,1719.42 cw(c1690.07,1727.96) v1@1678,1727.96 ; v1(1673,1727.96) 1759.21,1641.75 U3.77@1911.23,1641.75
  Top Layer w15: R17.2@1308,1727.96 R4.1@1511,1727.96 ; R17.2@1321.08,1714.88 cw(c1352.66,1683.29) 1352.66,1727.96 cw(c1352.66,1772.62) R17.2@1321.08,1741.04 ; v1@1460.25,1725.79 cw(c1466.51,1714.95) 1469.75,1727.04 ; v1@1460.25,1730.12 ccw(c1466.51,1740.96) 1469.75,1728.87 ; R4.1@1497.92,1714.88 ccw(c1466.34,1683.29) 1466.34,1727.96 ccw(c1466.34,1772.62) R4.1@1497.92,1741.04
  Bottom Layer w15: v1(1459,1727.96) v1(1673,1727.96)
USART4_RX: R1.1 R16.2 U3.112 | length 1957.3
  Top Layer w10: U3.112@2044.11,957.69 2044.11,978.51 cw(c2111.49,978.51) 2063.84,1026.16 cw(c2087.6,1002.4) 2076.34,1034.05 2085.63,1034.05 ccw(c2085.63,1134.05) 2105.26,1036 ccw(c2085.63,1134.05) 2156.34,1063.34 v1(2159,1066) ; 2147.84,1057.72 ccw(c2139.76,1069.92) v1@2154.1,1067 ; 2150.86,1059.71 cw(c2156.1,1051.78) v1@2158,1061.1
  Top Layer w15: R16.2@1308,1932 R1.1@1511,1932 ; R16.2@1321.08,1918.92 cw(c1352.66,1887.34) 1352.66,1932 cw(c1352.66,1976.66) R16.2@1321.08,1945.08 ; R1.1@1497.92,1918.92 ccw(c1466.34,1887.34) 1466.34,1932 ccw(c1466.34,1976.66) R1.1@1497.92,1945.08
  Bottom Layer w10: v1@1367,1927 cw(c1367,1914.93) 1375.54,1923.46 cw(c1384.07,1932) v1@1372,1932 ; v1(1367,1932) 1497,1802 1787,1802 2158.71,1430.29 cw(c2088,1359.58) 2188,1359.58 2188,1145.97 cw(c2147.03,1145.97) 2176,1117 ccw(c2217.04,1075.96) 2159,1075.96 v1(2159,1066) ; 2161.24,1084.34 ccw(c2181.4,1078.94) v1@2163.33,1068.5
USART4_TX: R2.1 R15.2 U3.111 | length 1831.5
  Top Layer w10: U3.111@2023.93,979.13 ccw(c2019.84,985.56) 2027.28,983.91 ; U3.111@2024.42,957.69 2024.42,971 cw(c2124.42,971) 2053.71,1041.71 cw(c2114.76,980.66) 2114.76,1067 v1(2119,1067) ; 2104.94,1064.92 cw(c2108.06,1050.18) v1@2116.27,1062.81
  Top Layer w15: R15.2@1308,1829.98 v1(1367,1829.98) R2.1@1511,1829.98 ; R15.2@1321.08,1816.9 cw(c1352.66,1785.32) 1352.66,1829.98 cw(c1352.66,1874.64) R15.2@1321.08,1843.06 ; R2.1@1497.92,1816.9 ccw(c1466.34,1785.32) 1466.34,1829.98 ccw(c1466.34,1874.64) R2.1@1497.92,1843.06
  Bottom Layer w10: v1@1367,1824.98 cw(c1367,1812.91) 1375.54,1821.44 cw(c1384.07,1829.98) v1@1372,1829.98 ; v1(1367,1829.98) 1435.98,1761 1742,1761 2117.71,1385.29 cw(c2047,1314.58) 2147,1314.58 2147,1134.6 cw(c2051.4,1134.6) v1(2119,1067) ; v1@2117.87,1071.87 ccw(c2115.14,1083.63) 2125.38,1077.25 ccw(c2135.63,1070.86) v1@2123.87,1068.13
USART5_RX: J4.9 U3.116 | length 2417.7
  Top Layer w10: J4.9@133.86,356 978.58,356 ccw(c978.58,456) 1049.29,385.29 1416.71,752.71 cw(c1487.42,682) 1487.42,782 1982.58,782 ccw(c1982.58,882) 2053.29,811.29 2093.56,851.56 ccw(c2022.85,922.27) 2122.85,922.27 U3.116@2122.85,957.69 ; J4.9@144.47,345.39 cw(c170.07,319.79) 170.07,356 cw(c170.07,392.21) J4.9@144.47,366.61 ; J4.9@151.54,338.32 cw(c194.21,295.64) 194.21,356 cw(c194.21,416.36) J4.9@151.54,373.68
USART5_TX: J4.8 U3.113 | length 2310.4
  Top Layer w10: J4.8@133.86,456 1041.58,456 ccw(c1041.58,556) 1112.29,485.29 1410.71,783.71 cw(c1481.42,713) 1481.42,813 1931.58,813 ccw(c1931.58,913) 2002.29,842.29 2034.5,874.5 ccw(c1963.79,945.21) 2063.79,945.21 U3.113@2063.79,957.69 ; J4.8@144.47,445.39 cw(c170.07,419.79) 170.07,456 cw(c170.07,492.21) J4.8@144.47,466.61 ; J4.8@151.54,438.32 cw(c194.21,395.64) 194.21,456 cw(c194.21,516.36) J4.8@151.54,473.68 ; 2060.58,931.04 cw(c2068.73,929.19) U3.113@2064.27,936.26
USART6_RX: R7.1 R20.2 U3.124 | length 1904.8
  Top Layer w10: R20.2@1308,1131.94 v1(1376,1131.94) R7.1@1509,1131.94 ; R20.2@1315.78,1124.16 cw(c1334.56,1105.38) 1334.56,1131.94 cw(c1334.56,1158.49) R20.2@1315.78,1139.71 ; R20.2@1322.85,1117.09 cw(c1358.7,1081.24) 1358.7,1131.94 cw(c1358.7,1182.64) R20.2@1322.85,1146.79 ; v1@1372.46,1128.4 ccw(c1363.93,1119.87) 1363.93,1131.94 ccw(c1363.93,1144.01) v1@1372.46,1135.47 ; v1(1376,862) v1(1982,862) ; v1@1379.54,858.46 cw(c1388.07,849.93) 1388.07,862 cw(c1388.07,874.07) v1@1379.54,865.54 ; v1@1379.54,1128.4 cw(c1388.07,1119.87) 1388.07,1131.94 cw(c1388.07,1144.01) v1@1379.54,1135.47 ; R7.1@1494.15,1117.09 ccw(c1458.3,1081.24) 1458.3,1131.94 ccw(c1458.3,1182.64) R7.1@1494.15,1146.79 ; R7.1@1501.22,1124.16 ccw(c1482.44,1105.38) 1482.44,1131.94 ccw(c1482.44,1158.49) R7.1@1501.22,1139.72 ; v1@1978.46,858.46 ccw(c1969.93,849.93) 1969.93,862 ccw(c1969.93,874.07) v1@1978.46,865.54 ; v1@2275.46,1020.46 cw(c2263.73,1008.73) 2280.33,1008.73 ; U3.124@2280.33,957.69 v1@2280.33,1022.67
  Bottom Layer w10: v1@1372.46,865.54 ccw(c1363.93,874.07) 1376,874.07 ccw(c1388.07,874.07) v1@1379.54,865.54 ; v1@1372.46,1128.4 cw(c1363.93,1119.87) 1376,1119.87 cw(c1388.07,1119.87) v1@1379.54,1128.4 ; v1(1376,862) v1(1376,1131.94) ; v1(1982,862) 2018.58,862 ccw(c2018.58,962) 2089.29,891.29 2192.71,994.71 cw(c2263.42,924) 2263.42,1024 v1(2279,1024) ; v1@1985.54,858.46 cw(c1994.07,849.93) 1994.07,862 cw(c1994.07,874.07) v1@1985.54,865.54 ; v1@2275.46,1020.46 ccw(c2266.93,1011.93) 2266.93,1024 ccw(c2266.93,1036.07) v1@2275.46,1027.54
USART6_TX: R8.1 R19.2 U3.129 | length 2054.8
  Top Layer w10: v1(1344,839) v1(1853,839) ; v1@1347.54,835.46 cw(c1356.07,826.93) 1356.07,839 cw(c1356.07,851.07) v1@1347.54,842.54 ; v1@1849.46,835.46 ccw(c1840.93,826.93) 1840.93,839 ccw(c1840.93,851.07) v1@1849.46,842.54 ; v1(2299,1047) cw(c2299,967.25) 2378.75,967.25 U3.129@2378.75,957.69 ; v1@2301.54,1042.69 cw(c2307.66,1032.29) 2310.68,1043.97 cw(c2313.71,1055.66) v1@2303.31,1049.54 ; 2373.61,986.44 ccw(c2385.21,989.55) U3.129@2379.2,979.15
  Top Layer w15: R19.2@1308,1233.96 v1(1376,1233.96) R8.1@1509,1233.96 ; R19.2@1321.08,1220.88 cw(c1352.66,1189.29) 1352.66,1233.96 cw(c1352.66,1278.62) R19.2@1321.08,1247.04 ; R8.1@1495.92,1220.88 ccw(c1464.34,1189.3) 1464.34,1233.96 ccw(c1464.34,1278.62) R8.1@1495.92,1247.04
  Bottom Layer w10: v1@1340.46,842.54 ccw(c1331.93,851.07) 1344,851.07 ccw(c1356.07,851.07) v1@1347.54,842.54 ; v1(1344,839) 1344,1201.96 v1(1376,1233.96) ; v1@1371,1233.96 cw(c1358.93,1233.96) 1367.46,1225.42 cw(c1376,1216.89) v1@1376,1228.96 ; v1(1853,839) 1871.71,857.71 cw(c1942.42,787) 1942.42,887 1999.58,887 ccw(c1999.58,987) 2070.29,916.29 2171.71,1017.71 cw(c2242.42,947) 2242.42,1047 v1(2299,1047) ; v1@1853,844 ccw(c1853,856.07) 1861.54,847.54 ccw(c1870.07,839) v1@1858,839 ; v1@2295.46,1043.46 ccw(c2286.93,1034.93) 2286.93,1047 ccw(c2286.93,1059.07) v1@2295.46,1050.54
VCAP_1: C2.2 U3.71 | length 316.4
  Top Layer w10: C2.2@1869.6,1939 1970,1939 2004.74,1904.26 U3.71@2004.74,1794.31 ; C2.2@1880.21,1928.39 cw(c1905.82,1902.79) 1905.82,1939 cw(c1905.82,1975.21) C2.2@1880.21,1949.61
VCAP_2: C1.2 U3.106 | length 1359.6
  Top Layer w10: v1@1689.46,1996.46 cw(c1680.93,1987.93) 1693,1987.93 cw(c1705.07,1987.93) v1@1696.54,1996.46 ; v1(1693,2000) 1693,1761 v1(1764,1690) ; v1@1759,1690 ccw(c1746.93,1690) 1755.46,1698.54 ccw(c1764,1707.07) v1@1764,1695 ; U3.106@1911.23,1070.88 1954.88,1070.88 ccw(c1954.88,1116) 2000,1116 v1(2000,1250) ; v1@1996.46,1246.46 cw(c1987.93,1237.93) 2000,1237.93 cw(c2012.07,1237.93) v1@2003.54,1246.46
  Bottom Layer w10: v1(1693,2000) 1749,2056 v1(1771,2056) ; v1@1693,2005 ccw(c1693,2017.07) 1701.54,2008.54 ccw(c1710.07,2000) v1@1698,2000 ; v1@1764,1685 cw(c1764,1672.93) 1772.54,1681.46 cw(c1781.07,1690) v1@1769,1690 ; v1(1764,1690) 2000,1454 v1(2000,1250) ; v1@1767.46,2052.46 ccw(c1758.93,2043.93) 1758.93,2056 ccw(c1758.93,2068.07) v1@1767.46,2059.54 ; v1@1996.46,1253.54 ccw(c1987.93,1262.07) 2000,1262.07 ccw(c2012.07,1262.07) v1@2003.54,1253.54
VIN: J7.1 J7.10 R23.2 | length 739.7
  Top Layer w20: R23.2@2906.89,503 cw(c2906.89,459.54) 2937.62,490.27 ; R23.2@2906.89,521 2976.89,451 J7.1@3333,451 ; R23.2@2922.89,519 ccw(c2956.69,519) R23.2@2932.79,495.1 ; J7.10@3219.19,437.19 ccw(c3185.86,403.86) 3185.86,451 ccw(c3185.86,498.14) J7.10@3219.19,464.81 ; J7.10@3246.81,437.19 cw(c3280.14,403.86) 3280.14,451 cw(c3280.14,498.14) J7.10@3246.81,464.81 ; J7.1@3318.86,436.86 ccw(c3284.72,402.72) 3284.72,451 ccw(c3284.72,499.28) J7.1@3318.86,465.14
pads on no net: J3.1 J5.1 U3.6 U3.100 U3.103
copper on no net:
  other v2: 125.5,45.5 3614.66,45.5 85.5,55.5 165.5,55.5 3574.66,55.5 3654.66,55.5 55.5,85.5 195.5,85.5 3544.66,85.5 3684.66,85.5 45.5,125.5 205.5,125.5 3534.66,125.5 3694.66,125.5 55.5,165.5 195.5,165.5 3544.66,165.5 3684.66,165.5 85.5,195.5 165.5,195.5 3574.66,195.5 3654.66,195.5 125.5,205.5 3614.66,205.5 125.5,2314.19 3614.66,2314.19 85.5,2324.19 165.5,2324.19 3574.66,2324.19 3654.66,2324.19 55.5,2354.19 195.5,2354.19 3544.66,2354.19 3684.66,2354.19 45.5,2394.19 205.5,2394.19 3534.66,2394.19 3694.66,2394.19 55.5,2434.19 195.5,2434.18 3544.66,2434.18 3684.66,2434.19 85.5,2464.19 165.5,2464.18 3574.66,2464.18 3654.66,2464.19 125.5,2474.18 3614.66,2474.18
  other v3: 125.5,125.5 3614.66,125.5 125.5,2394.19 3614.66,2394.19

## Polygon pours and split planes (outlines as drawn)
AGND on Bottom Layer "Bottom Layer-No Net" (solid, remove dead copper, pour order 4): 0,0 0,2519.69 3740.16,2519.69 3740.16,0

## Keep-outs
Keep-Out Layer:
  the board outline again, w7.87

## Other copper
Top Layer:
  rectangle net +3.3V: 2720,1634 2777,1667
  rectangle net +3.3V: 2653,931 2674,984

## Silkscreen, mask and mechanical layers (free items; w line width, h text height)
Top Overlay:
  text "GND" at 565,2183 h50
  text "+5v" at 700,2183.2 h50
  text "RST" at 1093,2182.85 h50
  text "+3.3V" at 1189,2183.2 h50
  text "RxD" at 786,2181.98 h50
  text "TxD" at 892,2181.98 h50
  text "BOOT0" at 977,2136 h50
  text "MGS" at 377,2103 h80 r270
  text "Brushless Motor R" at 2177,2082 h80
  text "USB TTL" at 632,2064 h80
  text "RFID" at 365,1598 h80 r270
  text "Service Plate" at 3350,1478 h100 r90
  text "USART PORT" at 270,951 h80 r270
  text "GND" at 2987,829 h80
  text "+3.3V" at 2987,729.47 h80
  text "GND" at 780,687 h50
  text "CLK" at 907,686.56 h50
  text "+3.3V" at 1105,687 h50
  text "DIO" at 1010,686.39 h50
  text "STATE" at 1447,685.5 h30
  text "TXD" at 1568,686 h30
  text "RXD" at 1660,686 h30
  text "+5V" at 1866,686 h30
  text "BT_EN" at 1954,686 h30
  text "GND" at 1751.2,685.36 h30
  text "+5V" at 2987,629.63 h80
  text "+12V" at 2987,529.79 h80
  text "Bluetooth" at 1546,458 h80
  text "J-Link" at 854.91,451 h80
  text "VIN" at 2987,428 h80
  text "Brushless Motor L" at 2145,403 h80
  text "TOUCH & IO" at 764,266 h80